# Altium PCB EMG_PCB.PcbDoc
Units mil, origin at the board's own origin, x right, y up, seen from the top; angles counter-clockwise.
Board outline 3800 x 2500 mil, 2 copper layers (Top Layer, Bottom Layer); 66 components, 55 nets, 207 pads, 11 vias.
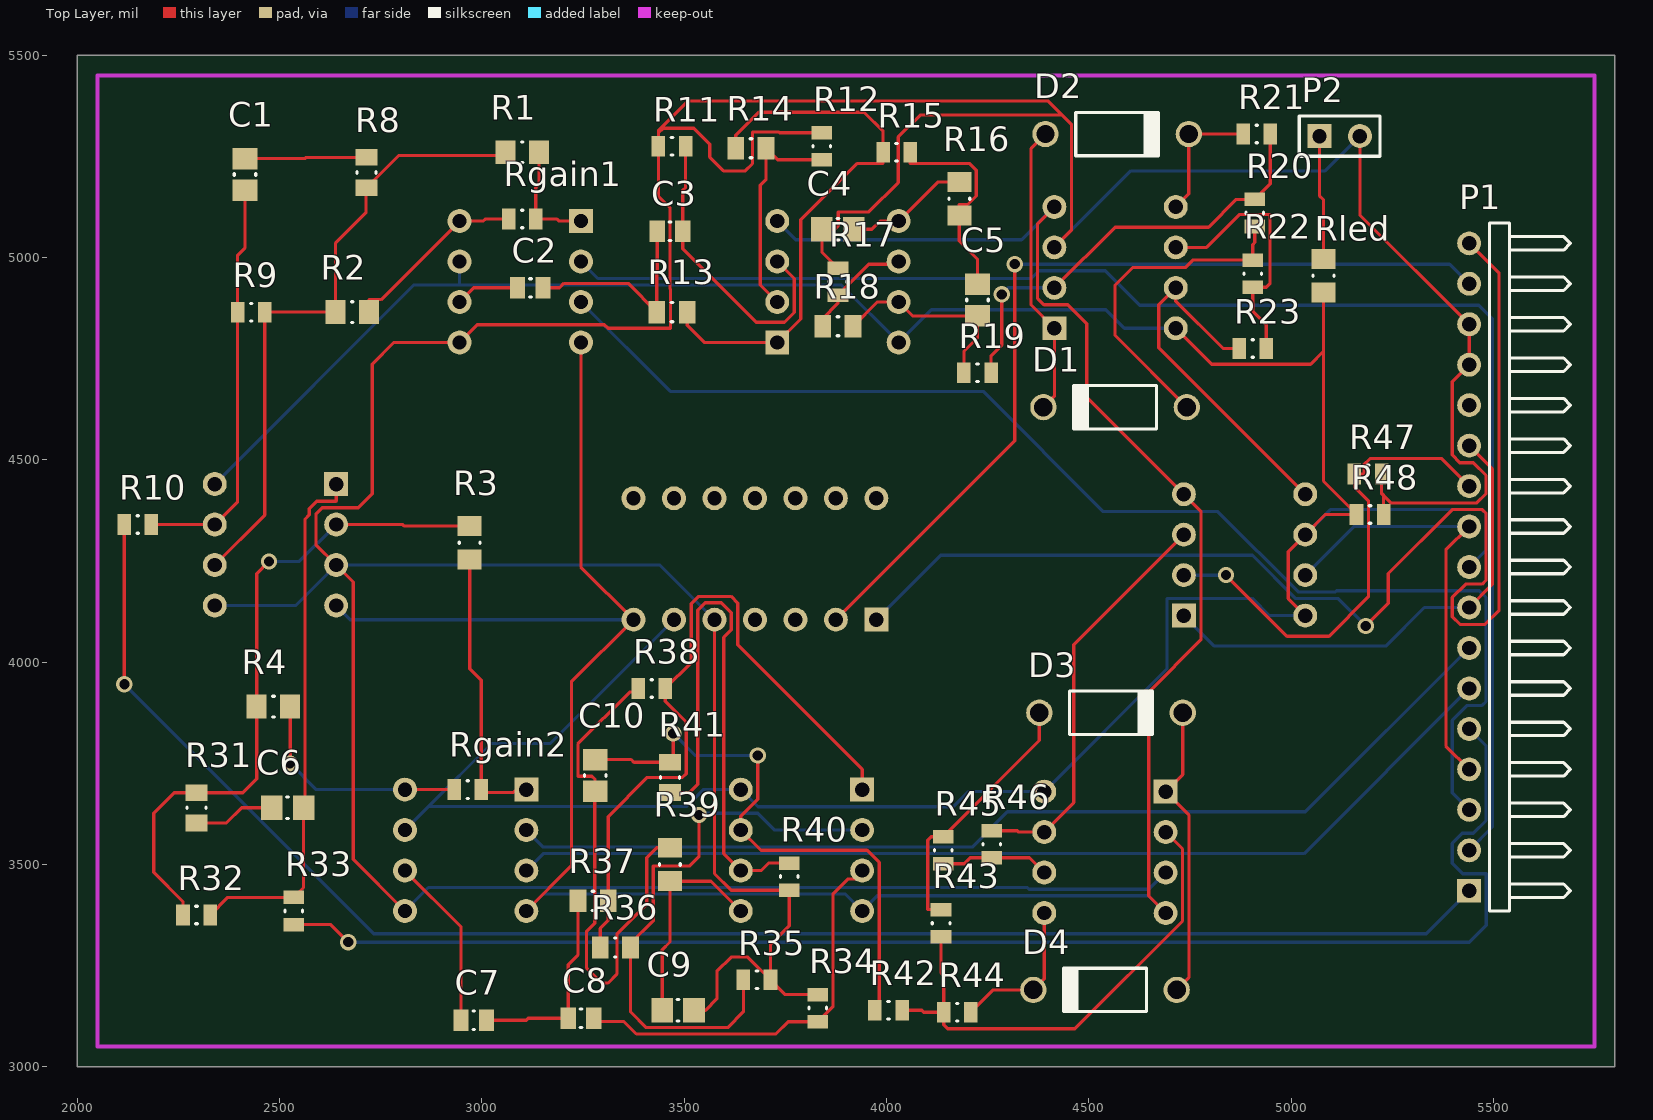
[diagram p0: Top Layer view]
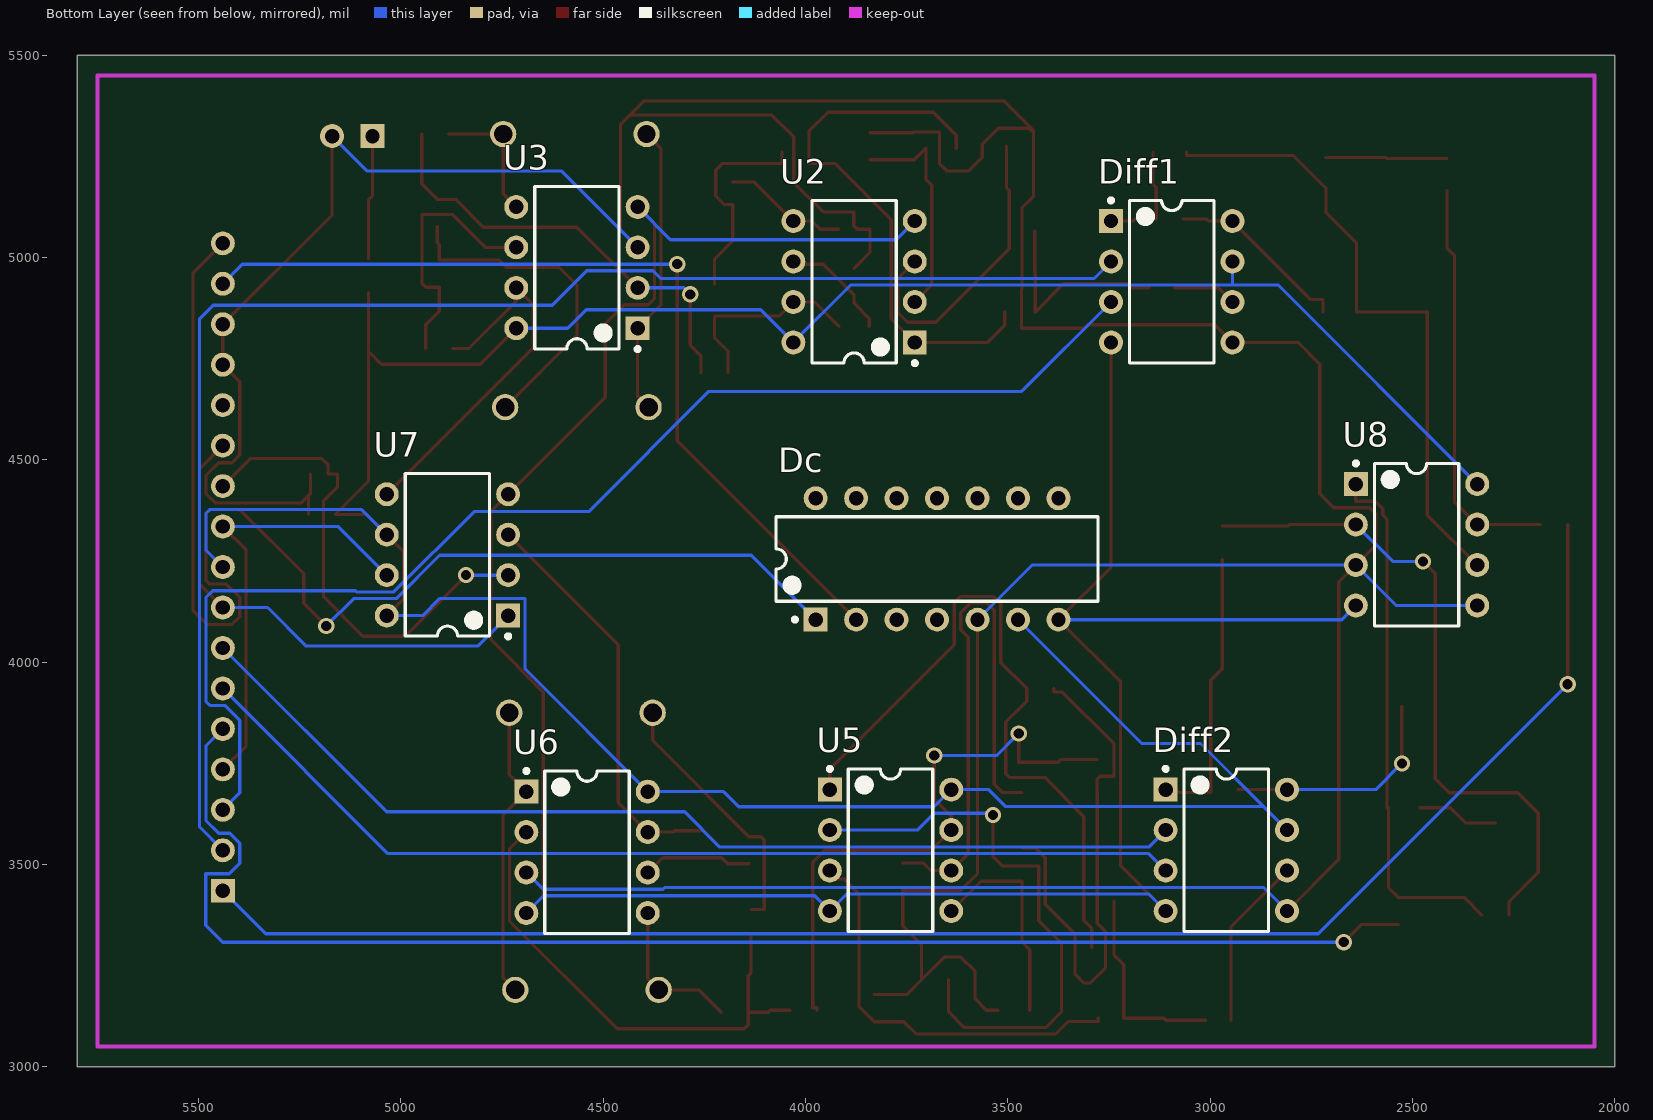
[diagram p1: Bottom Layer view, seen from below]

## Layer stack, top to bottom
Top Solder: solder mask 0.4, Solder Resist, Dk 3.5
Top Layer: signal copper 1.4
Dielectric 1: dielectric 12.6, FR-4, Dk 4.8
Bottom Layer: signal copper 1.4
Bottom Solder: solder mask 0.4, Solder Resist, Dk 3.5

## Board outline
2000,3000 5800,3000 5800,5500 2000,5500

## Design rules (kind name [scope] priority, off if disabled: settings)
Clearance [All] p1: gap=8
PolygonConnect [All] p1: connectstyle=Relief reliefconductorwidth=10 reliefentries=4 polygonreliefangle="90 Angle" airgapwidth=10
RoomDefinition EMG_Connections [InComponentClass('EMG_Connections')] p1: confinementstyle=ConfineIn formatcopy=TRUE lockcomponents=FALSE outline 5845,3655 7015,3655 7015,5475 5845,5475
RoomDefinition EMG_biofedback [InComponentClass('EMG_biofedback')] p2: confinementstyle=ConfineIn formatcopy=TRUE lockcomponents=FALSE outline 5845,3065 21215,3065 21215,3605 5845,3605
RoutingVias [All] p1: holewidth=25 width=40 viastyle="Through Hole" minholewidth=28 minwidth=50 maxholewidth=28 maxwidth=50
SolderMaskExpansion [All] p1: expansion=4
Width [All] p1: maxlimit=8 minlimit=8 preferedwidth=8
29 further rules are at their usual default settings.

## Classes and differential pairs
component class EMG_Connections: Dc P1 P2 Rled
component class EMG_biofedback: C1 C2 C3 C4 C5 C6 C7 C8 C9 C10 D1 D2 D3 D4 Diff1 Diff2 R1 R2 R3 R4 R8 R9 R10 R11 R12 R13 R14 R15 R16 R17 R18 R19 R20 R21 R22 R23 R31 R32 R33 R34 R35 R36 R37 R38 R39 R40 R41 R42 R43 R44 R45 R46 R47 R48 Rgain1 Rgain2 U2 U3 U5 U6 U7 U8

## Components (designator, comment, footprint, x,y, rotation, side; value= is the part's Value field where it differs from the comment)
C1 "CAP 10nF 50V 0805(2012)" CAPC0805(2012)100_M 2415,5205 r90 top
C2 "CAP 1uF 50V 0805(2012)" CAPC0805(2012)145_L 3120,4925 r0 top
C3 "CAP 1uF 50V 0805(2012)" CAPC0805(2012)145_L 3465,5065 r0 top
C4 "CAP 47nF 50V 0805(2012)" CAPC0805(2012)145_M 3880,5070 r0 top
C5 "CAP 4.7nF 50V 0805(2012)" CAPC0805(2012)110_M 4225,4895 r270 top
C6 "CAP 10nF 50V 0805(2012)" CAPC0805(2012)100_M 2520,3640 r180 top
C7 "CAP 1uF 50V 0805(2012)" CAPC0805(2012)145_L 2980,3115 r0 top
C8 "CAP 1uF 50V 0805(2012)" CAPC0805(2012)145_L 3245,3120 r0 top
C9 "CAP 47nF 50V 0805(2012)" CAPC0805(2012)145_M 3485,3140 r180 top
C10 "CAP 4.7nF 50V 0805(2012)" CAPC0805(2012)110_M 3280,3720 r90 top
D1 "1N4758A" FAIR-DO-41-2_V 4565,4630 r180 top
D2 "1N4758A" FAIR-DO-41-2_V 4570,5305 r0 top
D3 "1N4758A" FAIR-DO-41-2_V 4555,3875 r0 top
D4 "1N4758A" FAIR-DO-41-2_V 4540,3190 r180 top
Dc "SW DIP-7" DIP-14 3675,4255 r90 bottom
Diff1 "LT1167CN8#PBF" LT-N8-8 3095,4940 r180 bottom
Diff2 "LT1167CN8#PBF" LT-N8-8 2960,3535 r180 bottom
P1 "Header 17H" HDR1X17H 5440,3435 r90 top
P2 "Header 2" HDR1X2 5070,5300 r0 top
R1 "30K 5% 0805(2012)" RESC0805(2012)_M 3100,5260 r0 top
R2 "30K 5% 0805(2012)" RESC0805(2012)_M 2680,4865 r180 top
R3 "30K 5% 0805(2012)" RESC0805(2012)_M 2970,4295 r270 top
R4 "30K 5% 0805(2012)" RESC0805(2012)_M 2485,3890 r180 top
R8 "12K 5% 0805(2012)" RESC0805(2012)_N 2715,5210 r90 top
R9 "1M 5% 0805(2012)" RESC0805(2012)_L 2430,4865 r0 top
R10 "1M 5% 0805(2012)" RESC0805(2012)_L 2150,4340 r0 top
R11 "6K2 5% 0805(2012)" RESC0805(2012)_L 3470,5275 r0 top
R12 "20K 5% 0805(2012)" RESC0805(2012)_L 3840,5275 r90 top
R13 "43K 5% 0805(2012)" RESC0805(2012)_N 3470,4865 r0 top
R14 "180K 5% 0805(2012)" RESC0805(2012)_N 3665,5270 r180 top
R15 "51K 5% 0805(2012)" RESC0805(2012)_L 4025,5260 r0 top
R16 "9K1 5% 0805(2012)" RESC0805(2012)_M 4180,5145 r90 top
R17 "20K 5% 0805(2012)" RESC0805(2012)_L 3880,4940 r90 top
R18 "180K 5% 0805(2012)" RESC0805(2012)_N 3880,4830 r0 top
R19 "10K 5% 0805(2012)" RESC0805(2012)_L 4225,4715 r0 top
R20 "10K 5% 0805(2012)" RESC0805(2012)_L 4910,5110 r270 top
R21 "10K 5% 0805(2012)" RESC0805(2012)_L 4915,5305 r180 top
R22 "10K 5% 0805(2012)" RESC0805(2012)_L 4905,4960 r270 top
R23 "10K 5% 0805(2012)" RESC0805(2012)_L 4905,4775 r180 top
R31 "12K 5% 0805(2012)" RESC0805(2012)_N 2295,3640 r270 top
R32 "1M 5% 0805(2012)" RESC0805(2012)_L 2295,3375 r180 top
R33 "1M 5% 0805(2012)" RESC0805(2012)_L 2535,3385 r90 top
R34 "6K2 5% 0805(2012)" RESC0805(2012)_L 3830,3145 r270 top
R35 "20K 5% 0805(2012)" RESC0805(2012)_L 3680,3215 r0 top
R36 "180K 5% 0805(2012)" RESC0805(2012)_N 3330,3295 r180 top
R37 "43K 5% 0805(2012)" RESC0805(2012)_N 3275,3410 r0 top
R38 "51K 5% 0805(2012)" RESC0805(2012)_L 3420,3935 r180 top
R39 "9K1 5% 0805(2012)" RESC0805(2012)_M 3465,3500 r270 top
R40 "20K 5% 0805(2012)" RESC0805(2012)_L 3760,3470 r270 top
R41 "180K 5% 0805(2012)" RESC0805(2012)_N 3465,3715 r90 top
R42 "10K 5% 0805(2012)" RESC0805(2012)_L 4005,3140 r0 top
R43 "10K 5% 0805(2012)" RESC0805(2012)_L 4135,3355 r90 top
R44 "10K 5% 0805(2012)" RESC0805(2012)_L 4175,3135 r0 top
R45 "10K 5% 0805(2012)" RESC0805(2012)_L 4140,3535 r270 top
R46 "10K 5% 0805(2012)" RESC0805(2012)_L 4260,3550 r90 top
R47 "10K 5% 0805(2012)" RESC0805(2012)_L 5190,4465 r0 top
R48 "10K 5% 0805(2012)" RESC0805(2012)_L 5195,4365 r0 top
Rgain1 "6K2 5% 0805(2012)" RESC0805(2012)_L 3100,5095 r0 top
Rgain2 "6K2 5% 0805(2012)" RESC0805(2012)_L 2965,3685 r0 top
Rled "1K 1% 0805(2012)" RESC0805(2012)_M 5080,4955 r90 top
U2 "TL072CP" TI-P8 3880,4940 r0 bottom
U3 "TL072CP" TI-P8 4565,4975 r0 bottom
U5 "TL072CP" TI-P8 3790,3535 r180 bottom
U6 "TL072CP" TI-P8 4540,3530 r180 bottom
U7 "TL072CP" TI-P8 4885,4265 r0 bottom
U8 "TL072CP" TI-P8 2490,4290 r180 bottom

## Footprints (in the part's own frame and the unit in brackets; to place one, negate y for a bottom-side part, rotate by r counter-clockwise, add the part's x,y. Pads: shape width x height; smd on the part's side, far side on the other; paste and mask are expansions set on the pad)
CAPC0805(2012)100_M [mm] "Chip Capacitor, Body 2.0x1.2mm, Height 1.0mm, IPC Low Density"
  rect 1.35x1.55 smd: 1(-1,0) 2(1,0)
  silkscreen extent -0.05,-0.67 0.05,0.67, body extent -1.1,-0.72 1.1,0.72, height 1
CAPC0805(2012)110_M [mm] "Chip Capacitor, Body 2.0x1.2mm, Height 1.1mm, IPC Low Density"
  rect 1.35x1.55 smd: 1(-1,0) 2(1,0)
  silkscreen extent -0.05,-0.67 0.05,0.67, body extent -1.1,-0.72 1.1,0.72, height 1.1
CAPC0805(2012)145_L [mm] "Chip Capacitor, Body 2.0x1.2mm, Height 1.45mm, IPC High Density"
  rect 0.95x1.35 smd: 1(-0.8,0) 2(0.8,0)
  silkscreen extent -0.05,-0.58 0.05,0.58, body extent -1.1,-0.72 1.1,0.72, height 1.45
CAPC0805(2012)145_M [mm] "Chip Capacitor, Body 2.0x1.2mm, Height 1.45mm, IPC Low Density"
  rect 1.35x1.55 smd: 1(-1,0) 2(1,0)
  silkscreen extent -0.05,-0.67 0.05,0.67, body extent -1.1,-0.72 1.1,0.72, height 1.45
DIP-14 [mm] "DIP; 14 Leads; Row Spacing 7.62 mm; Pitch 2.54 mm"
  rect 1.5x1.5 hole 0.9: 1(-3.81,7.62)
  round 1.5 hole 0.9: 2(-3.81,5.08) 3(-3.81,2.54) 4(-3.81,0) 5(-3.81,-2.54) 6(-3.81,-5.08) 7(-3.81,-7.62) 8(3.81,-7.62) 9(3.81,-5.08) 10(3.81,-2.54) 11(3.81,0) 12(3.81,2.54) 13(3.81,5.08) 14(3.81,7.62)
  silkscreen extent -3.93,-10.1 2.65,10.1, body extent -3.6,-10.1 3.6,10.1, height 5.08
FAIR-DO-41-2_V [mm] "2-Leads, Axial leaded, Body 2.72x5.2mm, Pin Spacing 9mm"
  round 1.65 hole 1.15: 1(-4.5,0) 2(4.5,0)
  silkscreen extent -2.6,-1.36 2.6,1.36, body extent -4.93,-1.36 4.93,1.36, height 2.71
HDR1X2 [mm] "Connector; Header; 2 Position"
  rect 1.5x1.5 hole 0.9: 1(0,0)
  round 1.5 hole 0.9: 2(2.54,0)
  silkscreen extent -1.27,-1.27 3.81,1.27
HDR1X17H [mm] "Connector; Header; 17 Position; Right Angle"
  rect 1.5x1.5 hole 0.9: 1(0,0)
  round 1.5 hole 0.9: 2(2.54,0) 3(5.08,0) 4(7.62,0) 5(10.16,0) 6(12.7,0) 7(15.24,0) 8(17.78,0) 9(20.32,0) 10(22.86,0) 11(25.4,0) 12(27.94,0) 13(30.48,0) 14(33.02,0) 15(35.56,0) 16(38.1,0) 17(40.64,0)
  silkscreen extent -1.27,-6.35 41.91,-1.27
LT-N8-8 [mm] "DIP, 8-Leads, Body 10.16x6.48mm, Pitch 2.54mm"
  rect 1.5x1.5 hole 0.9: 1(-3.81,3.81)
  round 1.5 hole 0.9: 2(-3.81,1.27) 3(-3.81,-1.27) 4(-3.81,-3.81) 5(3.81,-3.81) 6(3.81,-1.27) 7(3.81,1.27) 8(3.81,3.81)
  silkscreen extent -3.94,-5.1 2.65,5.23, body extent -3.95,-5.07 3.95,5.07, height 2.36
RESC0805(2012)_L [mm] "Chip Resistor, Body 2.0x1.3mm, IPC High Density"
  rect 0.85x1.3 smd: 1(-0.85,0) 2(0.85,0)
  silkscreen extent -0.05,-0.55 0.05,0.55, body extent -1.1,-0.67 1.1,0.68, height 0.7
RESC0805(2012)_M [mm] "Chip Resistor, Body 2.0x1.3mm, IPC Low Density"
  rect 1.25x1.5 smd: 1(-1.05,0) 2(1.05,0)
  silkscreen extent -0.05,-0.65 0.05,0.65, body extent -1.1,-0.67 1.1,0.67, height 0.7
RESC0805(2012)_N [mm] "Chip Resistor, Body 2.0x1.3mm, IPC Medium Density"
  rect 1.05x1.4 smd: 1(-0.95,0) 2(0.95,0)
  silkscreen extent -0.05,-0.6 0.05,0.6, body extent -1.1,-0.67 1.1,0.68, height 0.7
TI-P8 [mm] "DIP, 8-Leads, Body 9.59x6.35mm, Pitch 2.54mm"
  rect 1.5x1.5 hole 0.9: 1(-3.81,3.81)
  round 1.5 hole 0.9: 2(-3.81,1.27) 3(-3.81,-1.27) 4(-3.81,-3.81) 5(3.81,-3.81) 6(3.81,-1.27) 7(3.81,1.27) 8(3.81,3.81)
  silkscreen extent -3.93,-5.1 2.65,5.23, body extent -3.95,-5.07 3.95,5.07, height 5.08

## Part data
C1 C6: library part CMP-1036-03837-1, "CAP 10nF 50V ±1% 0805 (2012 Metric) Thickness 1mm SMD"
C2 C3 C7 C8: library part CMP-1036-04761-1, "CAP 1uF 50V ±10% 0805 (2012 Metric) Thickness 1.45mm SMD"
C4 C9: library part CMP-1036-04255-1, "CAP 47nF 50V ±5% 0805 (2012 Metric) Thickness 1.45mm SMD"
C5 C10: library part CMP-1036-03592-1, "CAP 4.7nF 50V ±10% 0805 (2012 Metric) Thickness 1.1mm SMD"
D1 D2 D3 D4: library part CMP-0892-00017-1, "Zener Diode, 56V, 1W, 5%, -65 to 200 degC, 2-Pin DO-41, Body 2.72 x 5.2 mm, RoHS"
Dc: "DIP Switch, 7 Position, SPST"
Diff1 Diff2: library part CMP-0359-01174-1, "Single Channel, Precision Operational Amplifier, Low Bias Current IA, 1 MHz Typical GBW, 1.2 V/us Typical SR, 4.6 to 40 V, 8-Pin DIP (N8-8), Commercial, Pb-Free"
P1: "Header, 17-Pin, Right Angle"
P2: "Header, 2-Pin"
R1 R2 R3 R4: library part CMP-1013-00109-1, "30K 0.125W 5% 0805 (2012 Metric)  SMD"
R8 R31: library part CMP-1013-00100-1, "12K 0.125W 5% 0805 (2012 Metric)  SMD"
R9 R10 R32 R33: library part CMP-1013-00146-1, "1M 0.125W 5% 0805 (2012 Metric)  SMD"
R11 R34 Rgain1 Rgain2: library part CMP-1013-00093-1, "6K2 0.125W 5% 0805 (2012 Metric)  SMD"
R12 R17 R35 R40: library part CMP-1013-00105-1, "20K 0.125W 5% 0805 (2012 Metric)  SMD"
R13 R37: library part CMP-1013-00113-1, "43K 0.125W 5% 0805 (2012 Metric)  SMD"
R14 R18 R36 R41: library part CMP-1013-00128-1, "180K 0.125W 5% 0805 (2012 Metric)  SMD"
R15 R38: library part CMP-1013-00115-1, "51K 0.125W 5% 0805 (2012 Metric)  SMD"
R16 R39: library part CMP-1013-00097-1, "9K1 0.125W 5% 0805 (2012 Metric)  SMD"
R19 R20 R21 R22 R23 R42 R43 R44 R45 R46 R47 R48: library part CMP-1013-00098-1, "10K 0.125W 5% 0805 (2012 Metric)  SMD"
Rled: library part CMP-1013-00510-1, "1K 0.125W 1% 0805 (2012 Metric)  SMD"
U2 U3 U5 U6 U7 U8: library part CMP-0017-00950-1, "Dual Low-Noise JFET-Input General-Purpose Operational Amplifier, 7 to 36 V, 0 to 70 degC, 8-pin DIP (P8), Pb-Free (RoHS)"

## Via types
v1: diameter 40, hole 25, Top Layer to Bottom Layer, 11 vias

## Nets (pads, with @x,y where several pads share a name; then routed paths per layer and width w, separated by ;. In a path a pad name is that pad's centre, name@x,y a point inside that pad or via, vN(x,y) a via of type N, cw(c..) or ccw(c..) an arc to the next point about the centre after c; other vN are vias at no path point)
-VCC: Dc.7 Diff1.4 Diff2.4 U2.4 U3.4 U5.4 U6.4 U7.4 U8.4 | length 6738.4
  Top Layer w8: Diff2.4 3221.49,3496.49 3221.49,3951.49 Dc.7 3245,4235 Diff1.4 ; U3.4 4373.47,5083.47 4373.47,4898.53 4389,4883 4448,4883 4495,4836 4495,4655 U7.4 4777,4373 4777,4055 4648,3926 4648,3422 U6.4
  Bottom Layer w8: U8.4 2675,4105 Dc.7 ; Diff2.4 3152,3427 3898,3427 U5.4 3977.47,3422.47 4647.53,3422.47 U6.4 ; U2.4 3776,5044 4334,5044 U3.4
GND: C4.1 C9.1 Dc.5 Diff1.5 Diff2.5 P1.14 P1.15 P2.2 R11.1 R12.2 R17.2 R34.1 R35.2 R40.2 R47.2 R48.2 U3.3 U6.3 U8.3 U8.5 | length 12775.3
  Top Layer w8: Diff2.5 2682,3513 2682,4198 U8.3 2590,4290 2590,4366 2605.53,4381.53 2694.53,4381.53 2729,4416 2729,4736 2783,4790 Diff1.5 2989,4834 3303,4834 3312,4825 3466,4825 3466,4922 3465,4923 3465,5123 3436.54,5151.46 R11.1 3436.54,5308.07 ; C9.1 3553,3140 3581,3168 3581,3236 3616,3271 3657.46,3271 R35.2 ; Dc.5 3575,3477.54 3616,3436.54 R40.2 3760,3348.54 3713.46,3302 R35.2 ; R34.1 3750,3178.46 R35.2 ; R12.2 3736,5308.46 3734.46,5310 3669,5310 3669,5232 3651,5214 3597,5214 3563,5248 3563,5280 3523.46,5319.54 3448,5319.54 3436.54,5308.07 ; R17.2 3840.63,5012.83 C4.1 3872,5070 3880.79,5078.79 3880.79,5112.51 3956.51,5112.51 4029,5185 4029,5298 4083,5352 4434,5352 ; U3.3 4457,5067 4457,5329 4434,5352 ; P2.2 5170,5105 P1.15 P1.14 5398,4693 5398,4512 5417,4493 5450,4493 5481.53,4461.47 5481.53,4416 5459,4393.47 5245.99,4393.47 5228.46,4411 ; R47.2 5223.46,4417 ; R48.2 5228.46,4411 ; 3436.54,5308.07 3436.54,5313 3510.54,5387 4399,5387 4434,5352 ; 5223.46,4417 5223.46,4416 5228.46,4411 ; 5223.46,4417 5228.46,4412 5228.46,4411
  Bottom Layer w8: U8.5 2540,4140 U8.3 3440,4240 Dc.5 ; Diff2.5 2868,3443 4348,3443 4352.53,3438.47 4648.47,3438.47 U6.3 ; U3.3 4604,5214 5084,5214 P2.2
NetC1_1: C1.1 R9.1 R10.2 U8.7 | length 1013.2
  Top Layer w8: R10.2 U8.7 2396.54,4396.54 R9.1 2396.54,5006 2415,5024.46 C1.1
NetC1_2: C1.2 R8.2 | length 301.3
  Top Layer w8: C1.2 2563,5244.37 2566.03,5247.4 R8.2
NetC2_1: C2.1 Diff1.6 | length 158
  Top Layer w8: Diff1.6 2980,4925 C2.1
NetC2_2: C2.2 C3.1 R13.1 | length 515.4
  Top Layer w8: C2.2 3192,4925 3203,4936 3361.6,4936 R13.1 3432.6,4964 3433.5,4964.91 C3.1
NetC3_2: C3.2 R11.2 U2.3 | length 760.4
  Top Layer w8: R11.2 3503.46,5172.97 3496.5,5166 C3.2 3496.5,5021.5 3678,4840 3748,4840 3772,4864 3772,4948 U2.3
NetC4_2: C4.2 R16.2 U2.5 | length 308.8
  Top Layer w8: C4.2 3964,5070 3984,5090 U2.5 4126.34,5186.34 R16.2
NetC5_1: C5.1 R15.2 R16.1 | length 528.1
  Top Layer w8: R15.2 4058.46,5232 4206,5232 4222,5216 4222,5152 4201,5131 4180,5131 R16.1 4180,5041 4225,4996 C5.1
NetC5_2: C5.2 R18.2 R19.1 U2.7 | length 501.2
  Top Layer w8: R18.2 3977.4,4890 U2.7 4064.37,4855.63 C5.2 4225,4801.46 4191.54,4768 R19.1
NetC6_1: C6.1 R32.1 R33.2 U8.1 | length 1319.5
  Top Layer w8: R32.1 2371.93,3418.46 R33.2 2559.37,3442.83 C6.1 2563,3640 2563,4353 2573.81,4363.81 2573.81,4379.34 2592,4397.53 2639.53,4397.53 2640,4398 U8.1
NetC6_2: C6.2 R31.2 | length 201.1
  Top Layer w8: R31.2 2369,3602.6 2406.4,3640 C6.2
NetC7_1: C7.1 Diff2.6 | length 427.4
  Top Layer w8: Diff2.6 2948.5,3346.5 C7.1
NetC7_2: C7.2 C8.1 R37.1 | length 504.1
  Top Layer w8: C7.2 3110,3115 3115,3120 C8.1 3213.5,3252 3237.6,3276.09 R37.1
NetC8_2: C8.2 R34.2 U5.3 | length 1027.1
  Top Layer w8: C8.2 3276.5,3112 3351,3112 3382,3081 3726.46,3081 3757,3111.54 R34.2 3868,3149.54 3868,3428 3904,3464 3940,3464 U5.3
NetC9_2: C9.2 R39.2 U5.5 | length 532.2
  Top Layer w8: C9.2 3445.63,3289 3465,3308.37 R39.2 3566.34,3458.66 U5.5
NetC10_1: C10.1 R38.2 R39.1 | length 1297.5
  Top Layer w8: R38.2 3386.54,3926 3365.49,3926 3237.49,3798 3237.49,3718 3272,3718 3280,3710 C10.1 3279,3680.63 3279,3355 3259,3335 3259,3244 3296,3207 3312,3207 3334,3229 3334,3328 3407.47,3401.47 3407.47,3516.81 3432,3541.34 R39.1
NetC10_2: C10.2 R41.2 R42.1 U5.7 | length 1451.3
  Top Layer w8: C10.2 3369,3759.37 3375.97,3752.4 R41.2 3473,3752.4 v1(3473,3824) ; v1(3682,3769) 3682,3661 3640,3619 U5.7 3690,3535 3952,3535 3982,3505 3982,3146 3971.54,3146 R42.1
  Bottom Layer w8: v1(3473,3824) 3528,3769 v1(3682,3769)
NetD1_1: D1.1 R20.2 R22.1 | length 826
  Top Layer w8: D1.1 4565,4807.17 4565,4932 4608,4975 4738.54,4975 4757,4993.46 R22.1 4905,5032 4910,5037 R20.2
NetD1_2: D1.2 D2.1 U3.1 | length 724.7
  Top Layer w8: D1.2 4415,4657.17 U3.1 4357.47,4882.53 4357.47,5269.64 D2.1
NetD2_2: D2.2 R21.2 U3.5 | length 327.7
  Top Layer w8: U3.5 4747.17,5157.17 D2.2 R21.2
NetD3_1: D3.1 R43.2 R45.1 | length 651.1
  Top Layer w8: R43.2 4102,3388.46 4102,3560 4110.46,3568.46 R45.1 4377.83,3806.3 D3.1
NetD3_2: D3.2 D4.1 U6.1 | length 738.9
  Top Layer w8: D4.1 4747.53,3220.36 4747.53,3622.47 U6.1 4732.17,3722.17 D3.2
NetD4_2: D4.2 R44.2 U6.5 | length 378.4
  Top Layer w8: R44.2 4263.46,3190 D4.2 4390,3217.17 U6.5
NetDiff1_1: Diff1.1 R1.2 Rgain1.2 | length 281.9
  Top Layer w8: R1.2 3141.34,5180.87 3133.46,5173 Rgain1.2 3186,5095 3191,5090 Diff1.1
NetDiff1_2: Diff1.2 P1.2 | length 3664.6
  Bottom Layer w8: Diff1.2 3287,4948 4357.47,4948 4376.94,4967.47 4540.53,4967.47 4626,4882 5464,4882 5497.53,4848.47 5497.53,3592.53 P1.2
NetDiff1_3: Diff1.3 P1.3 | length 3140.1
  Bottom Layer w8: Diff1.3 3466,4669 4239,4669 4536,4372 4819.19,4372 5017.72,4173.47 5109.47,4173.47 5112.53,4176.53 5465,4176.53 5481.53,4160 5481.53,3902.53 5472,3893 5435,3893 5398,3856 5398,3677 P1.3
NetDiff1_8: Diff1.8 R2.1 Rgain1.1 | length 458.6
  Top Layer w8: R2.1 2721.34,4896 2751,4896 Diff1.8 3003,5090 3008,5095 Rgain1.1
NetDiff2_1: Diff2.1 R3.2 Rgain2.2 | length 702.4
  Top Layer w8: R3.2 2970,3983.46 2998.46,3955 Rgain2.2 2998.46,3677.62 3077.1,3677.62 3084.47,3685 Diff2.1
NetDiff2_2: Diff2.2 P1.7 | length 2551.2
  Bottom Layer w8: Diff2.2 3152,3543 4212,3543 4299,3630 5035,3630 P1.7
NetDiff2_3: Diff2.3 P1.6 | length 2516.4
  Bottom Layer w8: Diff2.3 3152,3527 5032,3527 P1.6
NetDiff2_8: Diff2.8 R4.1 Rgain2.1 | length 572.3
  Top Layer w8: v1(2526.34,3749.66) R4.1 ; Diff2.8 Rgain2.1
  Bottom Layer w8: v1(2526.34,3749.66) 2591,3685 Diff2.8
NetP1_1: P1.1 R10.1 | length 4017.3
  Top Layer w8: v1(2116.54,3945.46) R10.1
  Bottom Layer w8: v1(2116.54,3945.46) 2733,3329 5334,3329 P1.1
NetP1_4: P1.4 P1.10 U7.7 | length 1102.4
  Top Layer w8: P1.4 5382.47,3792.53 5382.47,4277.47 P1.10
  Bottom Layer w8: U7.7 5155,4335 P1.10
NetP1_5: P1.5 R33.1 | length 3603.8
  Top Layer w8: R33.1 2626.46,3351.54 v1(2670,3308)
  Bottom Layer w8: v1(2670,3308) 5440,3308 5482,3350 5482,3477 5424,3477 5398,3503 5398,3552 5423,3577 5450,3577 5481.53,3608.53 5481.53,3793.47 P1.5
NetP1_8: P1.8 P1.12 U7.1 | length 1223.4
  Top Layer w8: P1.8 5497.53,4192.53 5497.53,4477.47 P1.12
  Bottom Layer w8: U7.1 4810.37,4039.63 5234,4039.63 5329.37,4135 P1.8
NetP1_11: P1.11 R47.1 U7.2 | length 1217.7
  Top Layer w8: v1(4838.72,4215) 4989.72,4064 5093.72,4064 5191,4161.28 5191,4399 5156.54,4433.46 R47.1 5180,4465 5180,4488 5195,4503 5372,4503 P1.11
  Bottom Layer w8: U7.2 v1(4838.72,4215)
NetP2_1: P2.1 Rled.2 | length 307.8
  Top Layer w8: P2.1 5070,5153 5080,5143 Rled.2
NetR1_1: R1.1 R2.2 R8.1 R9.2 U8.6 | length 1575.7
  Top Layer w8: U8.6 2463.46,4363.46 R9.2 R2.2 2638.66,5036 2714,5111.34 2714,5172.6 R8.1 2794.4,5252 3058.66,5252 R1.1
NetR3_1: R3.1 R4.2 R31.1 R32.2 U8.2 | length 1656.3
  Top Layer w8: R32.2 2261.54,3408 2189,3480.54 2189,3626.4 2240,3677.4 R31.1 2409.06,3677.4 2443.66,3712 R4.2 2443.66,4218.66 v1(2474,4249) ; U8.2 2805,4340 2808.66,4336.34 R3.1
  Bottom Layer w8: v1(2474,4249) 2549,4249 U8.2
NetR12_1: R12.1 R14.1 U2.2 | length 552.8
  Top Layer w8: U2.2 3688,4932 3688,5178.6 3702.4,5193 R14.1 3730.87,5241.54 R12.1
NetR13_2: R13.2 R14.2 R15.1 U2.1 | length 1380
  Top Layer w8: R13.2 3507.4,4832 3549.4,4790 U2.1 3788,4848 3788,5093 3927,5232 3991.54,5232 R15.1 3991.54,5312 3944.54,5359 3684.8,5359 3627.6,5301.8 R14.2
NetR17_1: R17.1 R18.1 U2.6 | length 280.7
  Top Layer w8: R18.1 3842.6,4849 3880,4886.4 R17.1 3956.46,4983 4030,4983 U2.6
NetR19_2: R19.2 R20.1 R21.1 U3.2 | length 1104.6
  Top Layer w8: R19.2 4258.46,4757 4285,4783.54 v1(4285,4909) ; U3.2 4565,5075 4795.93,5075 4864.4,5143.46 R20.1 4948.46,5181.93 R21.1
  Bottom Layer w8: v1(4285,4909) 4301,4925 U3.2
NetR22_2: R22.2 R23.1 U3.6 | length 648.9
  Top Layer w8: U3.6 4791,5025 4872,5106 4948,5106 4948,4936 4938.54,4926.54 R22.2 4905,4867.46 4938.46,4834 R23.1
NetR23_2: R23.2 U3.7 U7.5 | length 915.3
  Top Layer w8: R23.2 4832,4775 4715,4892 U3.7 4673,4883 4673,4777 U7.5
NetR35_1: R35.1 R36.1 U5.2 | length 1421.2
  Top Layer w8: v1(3537,3622) 3537,3520 3513,3496 3423.47,3496 3423.47,3361.07 3367.4,3305 R36.1 3367.4,3136 3406.4,3097 3607.54,3097 3646.54,3136 R35.1
  Bottom Layer w8: v1(3537,3622) 3541.53,3626.53 3682,3626.53 3723.53,3585 U5.2
NetR36_2: R36.2 R37.2 R38.1 U5.1 | length 1753.7
  Top Layer w8: R36.2 3292.6,3342 3312.4,3361.8 R37.2 3312.4,3618.4 3409,3715 3496,3715 3505,3724 3505,3852 3453.46,3903.54 R38.1 3517.47,3999.01 3517.47,4144 3536,4162.53 3616,4162.53 3632.53,4146 3632.53,4042.47 3940,3735 U5.1
NetR40_1: R40.1 R41.1 U5.6 | length 1397.6
  Top Layer w8: R41.1 3513,3677.6 3533.47,3698.07 3533.47,4128 3552,4146.53 3592.2,4146.53 3616.53,4122.2 3616.53,4079.53 3598,4061 3598,3527 U5.6 3690,3485 3708.46,3503.46 R40.1
NetR42_2: R42.2 R43.1 R44.1 U6.2 | length 1266.9
  Top Layer w8: R42.2 4087,3140 4092,3135 R44.1 ; R43.1 4135,3231.54 4141.54,3225 R44.1 ; U6.2 4731.53,3538.47 4731.53,3360 4465.53,3094 4151.54,3094 4141.54,3104 R44.1
NetR45_2: R45.2 R46.1 U6.6 | length 271.3
  Top Layer w8: R45.2 4192,3501.54 4207,3516.54 R46.1 4353.46,3516.54 U6.6
NetR46_2: R46.2 U6.7 U7.3 | length 1009.3
  Top Layer w8: R46.2 4323,3583.46 4326.46,3580 U6.7 4463,3653 4463,4043 U7.3
"USB GND": Dc.2 P1.16 | length 2204.6
  Top Layer w8: Dc.2 4317,4547 v1(4317,4983.47)
  Bottom Layer w8: v1(4317,4983.47) 5391.53,4983.47 P1.16
"USB VS": Dc.1 P1.17 | length 3200.5
  Top Layer w8: v1(5184.5,4089.5) 5240,4145 5240,4219 5398,4377 5472.53,4377 5481.53,4368 5481.53,4202.53 5472,4193 5431.47,4193 5398.47,4160 5398.47,4112 5417.47,4093 5479,4093 5514,4128 5514,4961 P1.17
  Bottom Layer w8: Dc.1 4134,4264 4904.57,4264 5011.57,4157 5117,4157 v1(5184.5,4089.5)
VCC: Dc.6 Diff1.7 Diff2.7 P1.9 R48.1 Rled.1 U2.8 U3.8 U5.8 U6.8 U7.6 U7.8 U8.8 | length 8169.4
  Top Layer w8: U3.8 4804,4736 5048,4736 5080,4768 ; U7.8 4993,4157 4993,4273 U7.6 5085,4365 R48.1 5161.54,4365.93 5080,4447.46 5080,4768 ; Rled.1 5080,4768
  Bottom Layer w8: U8.8 2832,4932 2945,4932 ; Diff2.7 2868,3643 ; Diff1.7 2945,4932 ; Dc.6 3169,3799 3024,3799 2868,3643 ; U3.8 4588,4825 4542,4871 4111,4871 U2.8 3888,4932 2945,4932 ; U7.8 4946,4115 4903.53,4157.47 4693,4157.47 4693,3983 U6.8 4202.47,3680 4165,3642.53 3682.47,3642.53 U5.8 3547.05,3685 3505.05,3643 2868,3643 ; U7.6 5097,4377 5472.53,4377 5481.53,4368 5481.53,4276.53 P1.9
pads on no net: Dc.3 Dc.4 Dc.8 Dc.9 Dc.10 Dc.11 Dc.12 Dc.13 Dc.14 P1.13

## Keep-outs
Keep-Out Layer:
  lines w10: 2050,3050 2050,5450 5750,5450 5750,3050 2050,3050

## Silkscreen, mask and mechanical layers (free items; w line width, h text height)
Drill Drawing:
  text ".LEGEND" at 6000,3200 h60
  text "Drill Drawing." at 6000,3100 h60

## Dimensions
2050,3050 to 2050,5450 on Mechanical 1
2050,3050 to 5750,3050 on Mechanical 1